# Altium PCB STM32 FillLab WalkThrough.PcbDoc
Units mm, origin at the board's own origin, x right, y up, seen from the top; angles counter-clockwise.
Board outline 34 x 34 mm, 4 copper layers (Top Layer(Signal), L2 (GND), L3 (GND), Bottom Layer(Signal)), stack 1.57 mm thick; 35 components, 27 nets, 172 pads, 102 vias.
Unrouted connection lines stored in the file: 1.
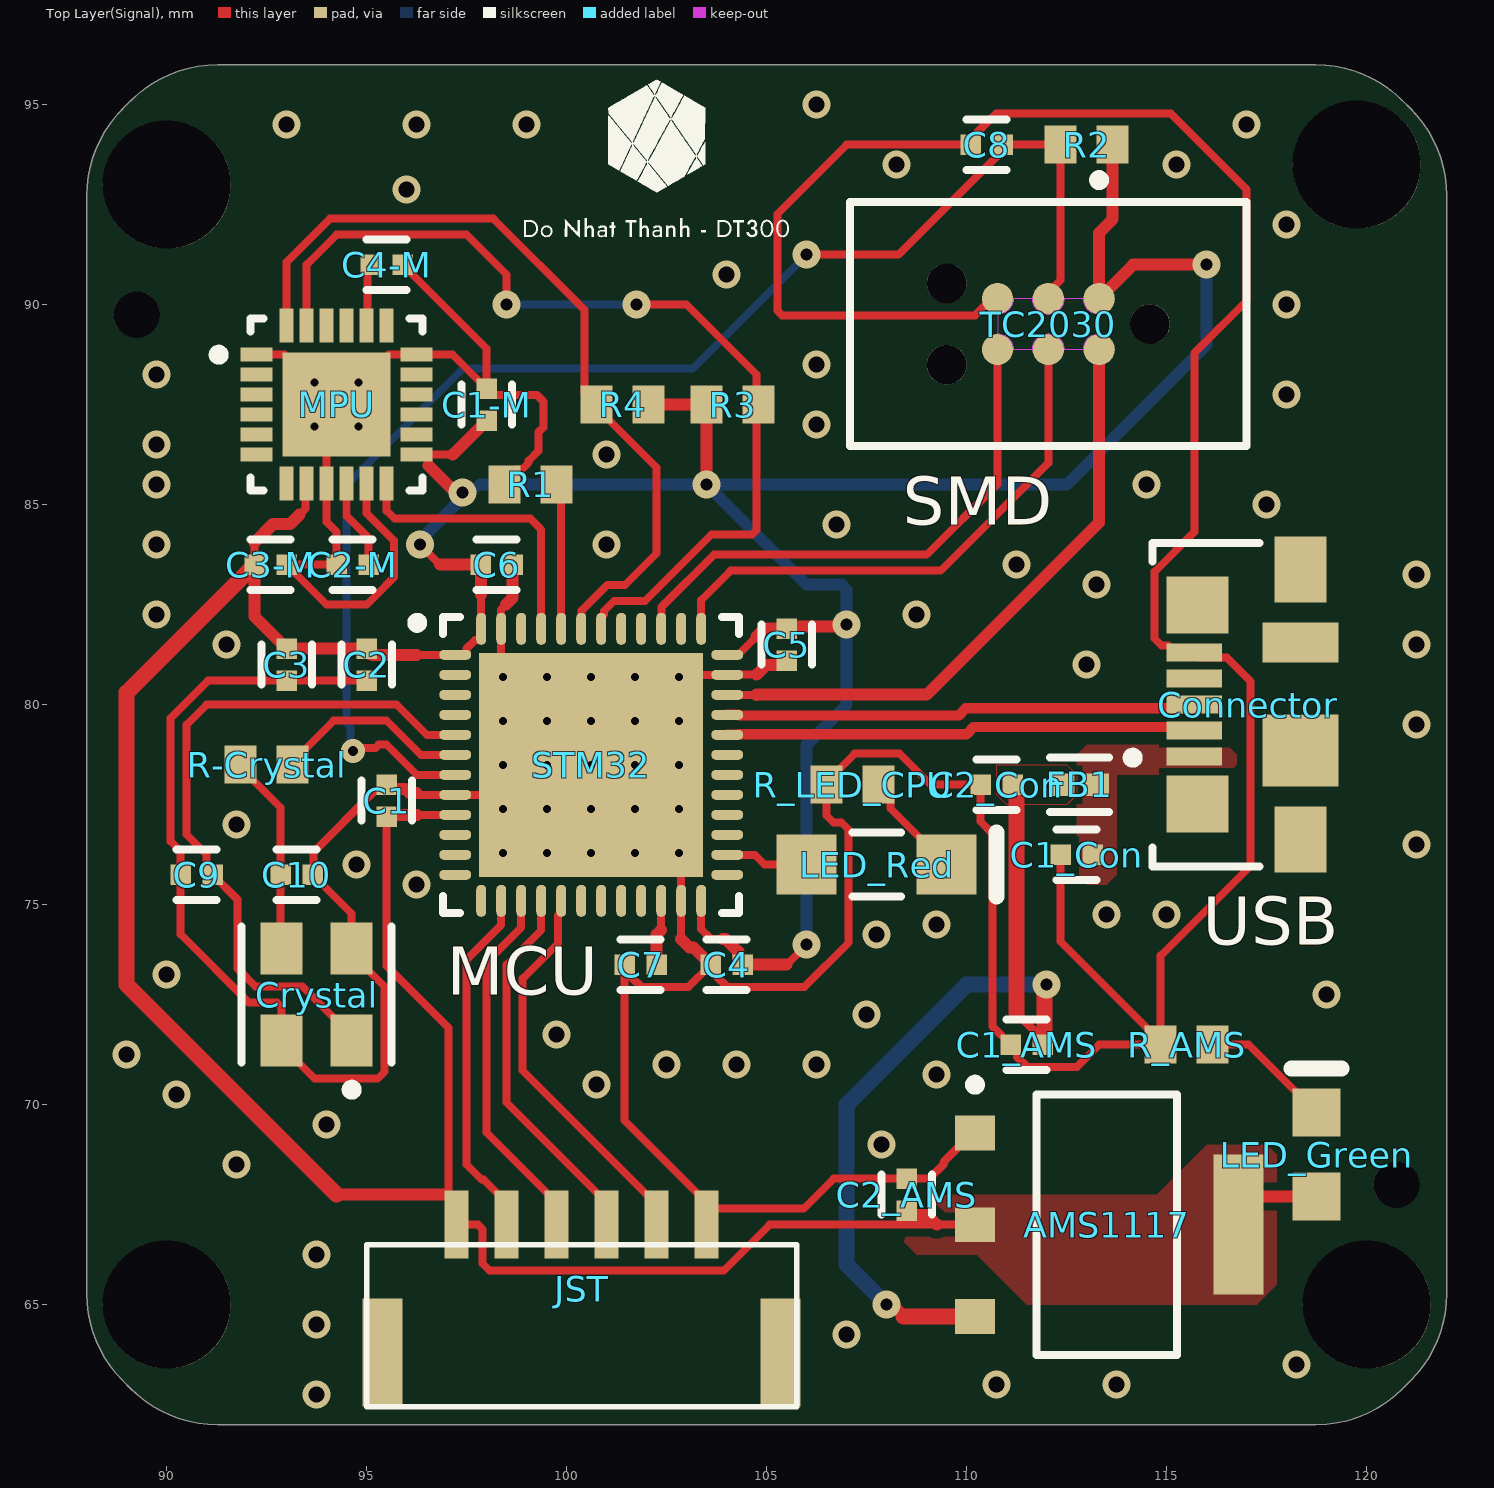
[diagram p0: Top Layer(Signal) view]
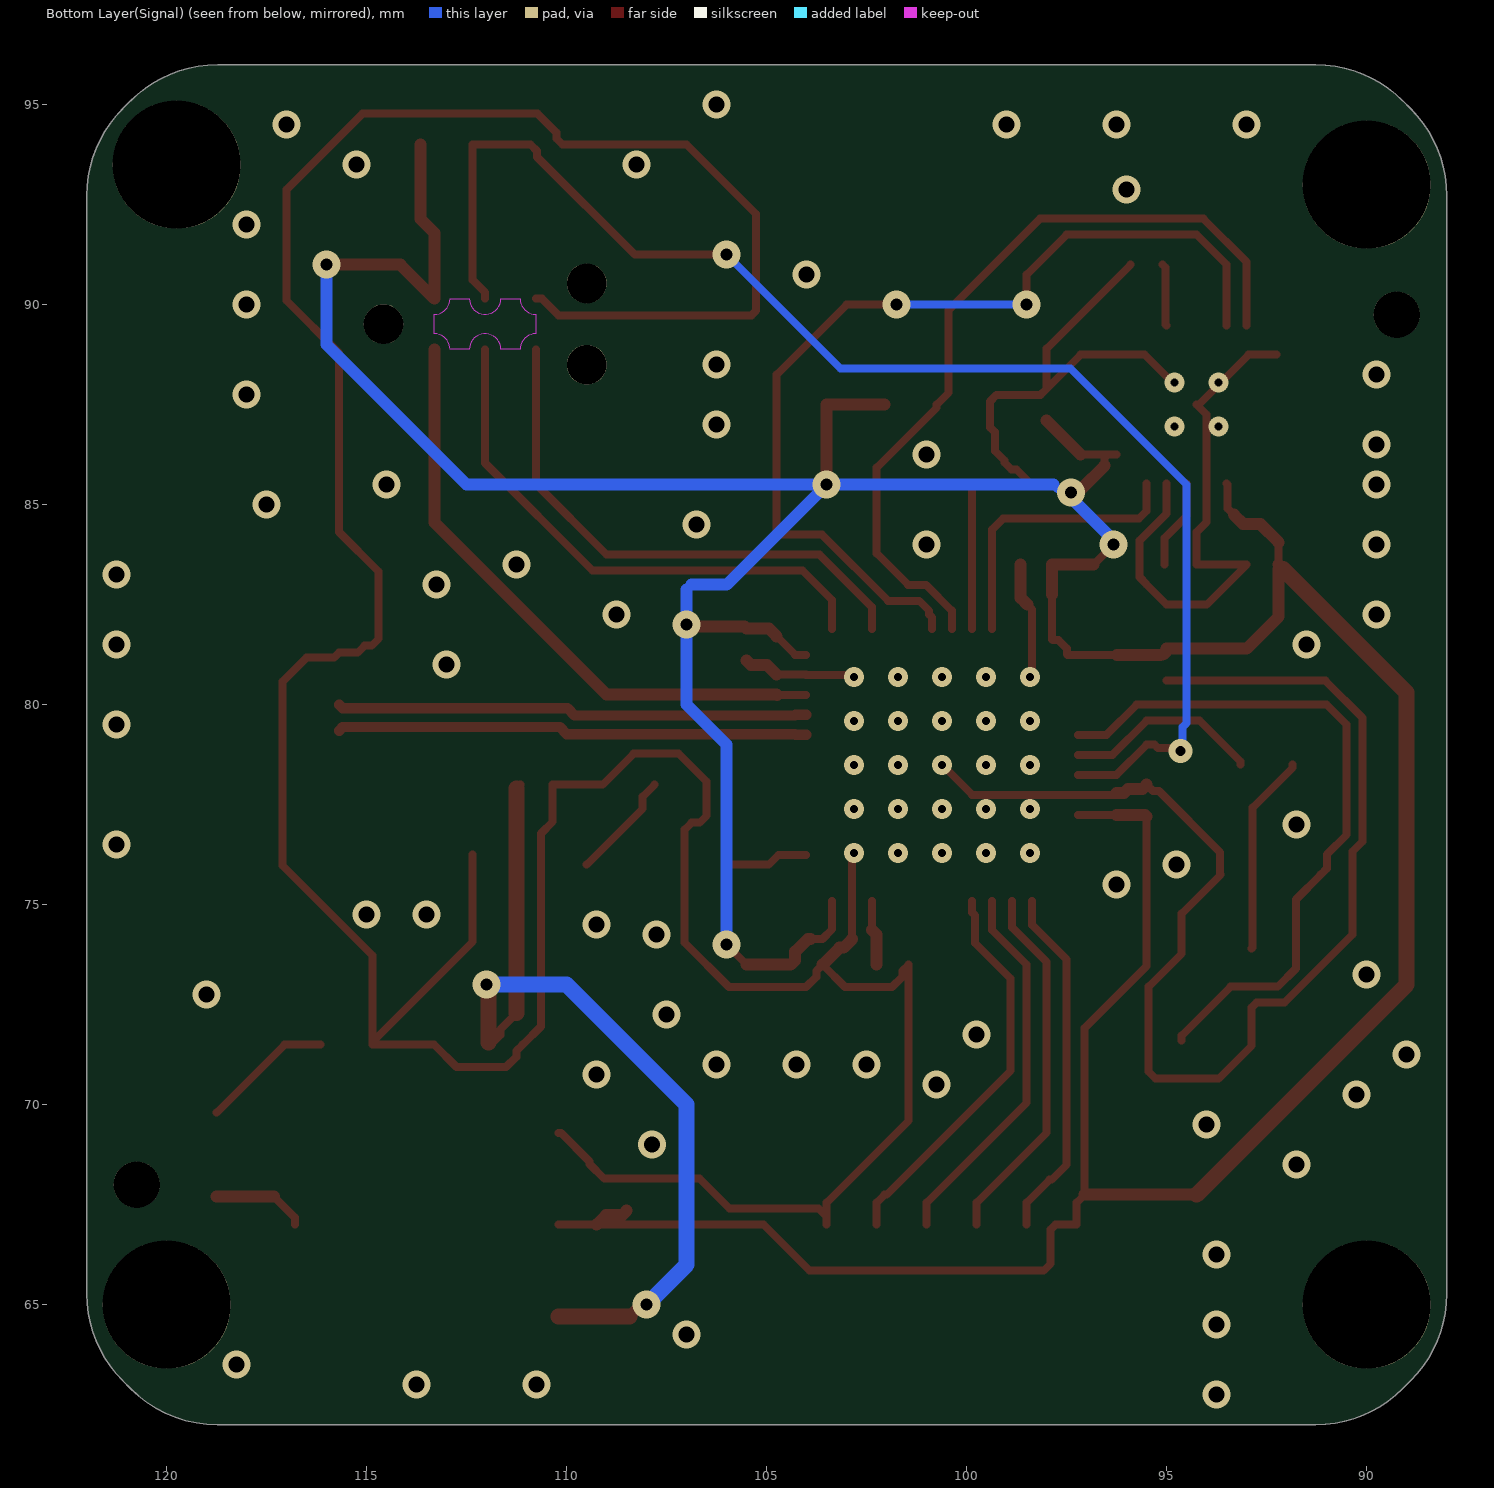
[diagram p1: Bottom Layer(Signal) view, seen from below]
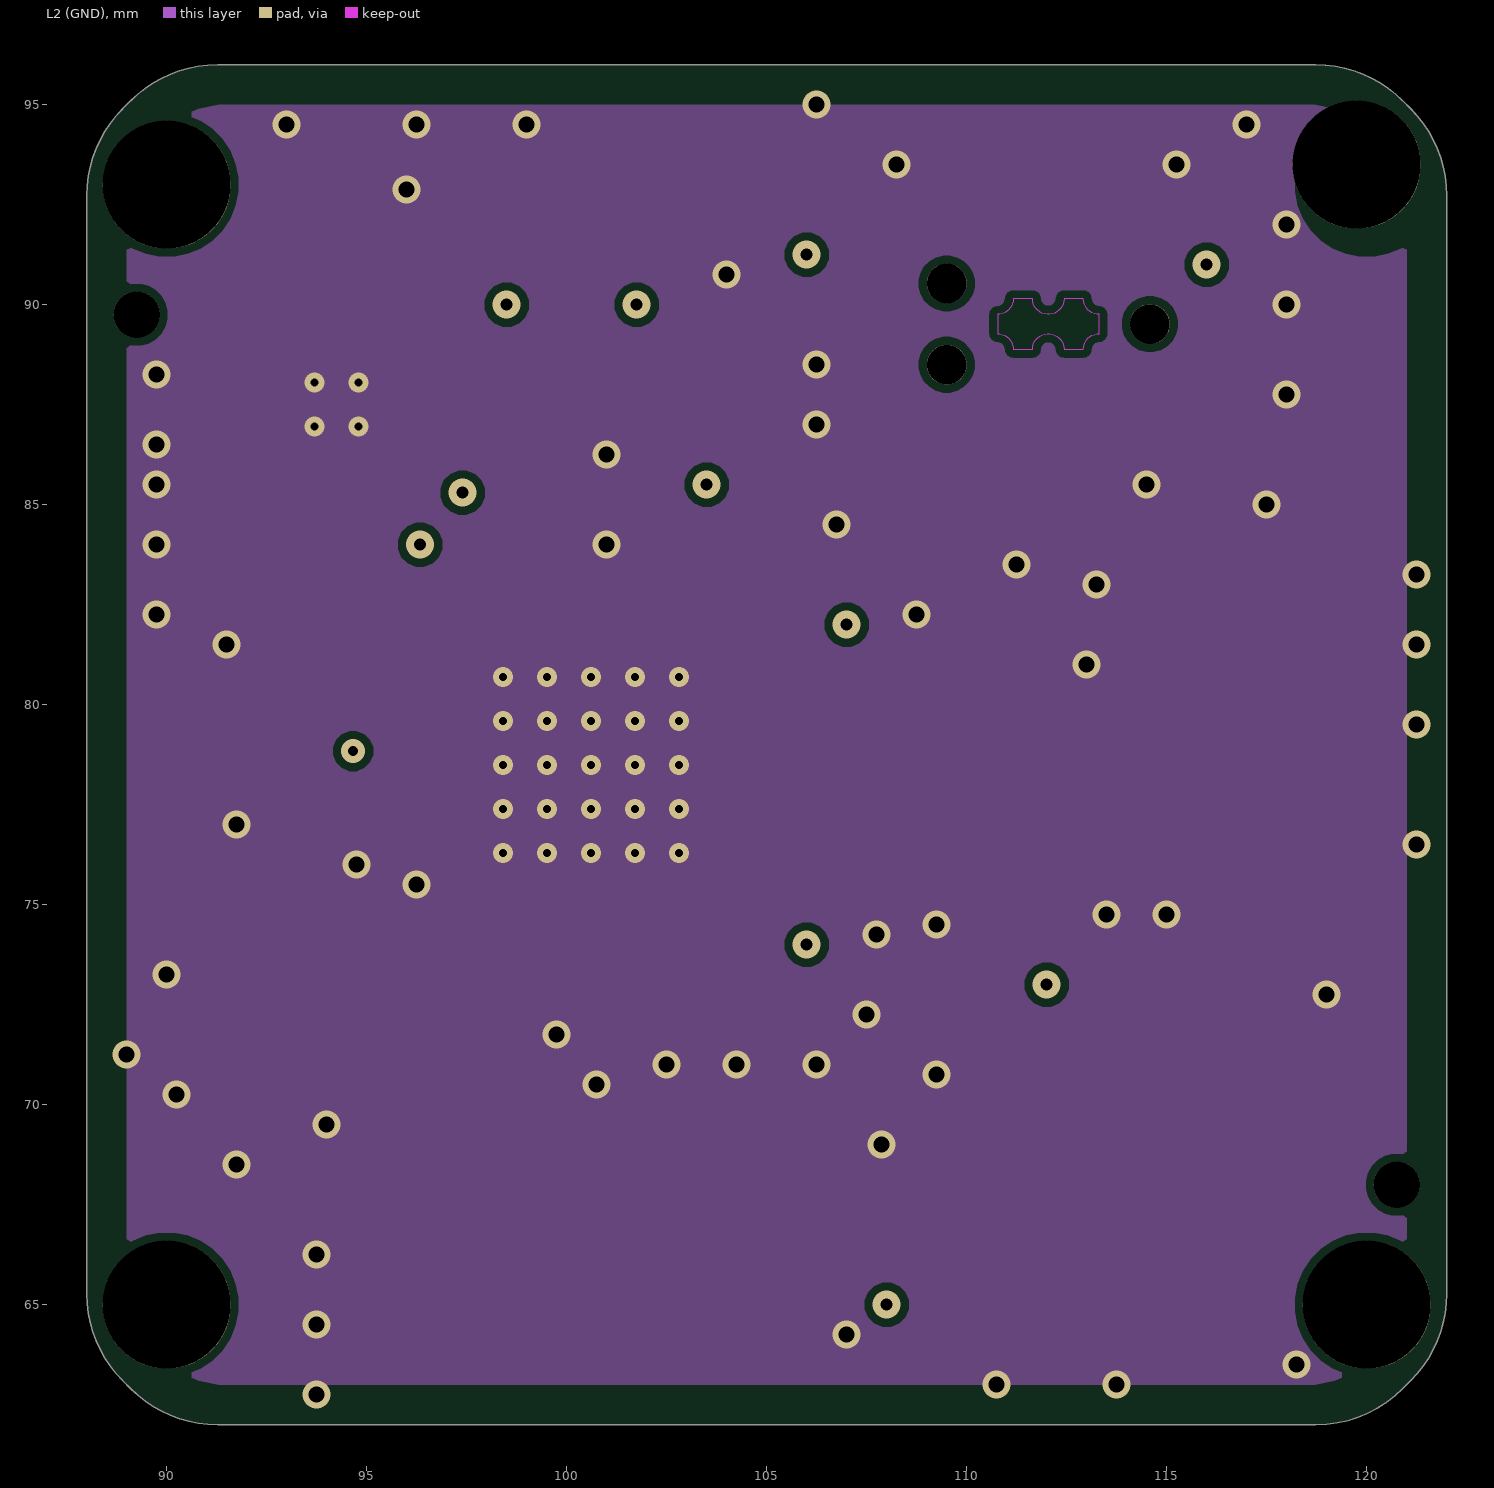
[diagram p2: L2 (GND)]
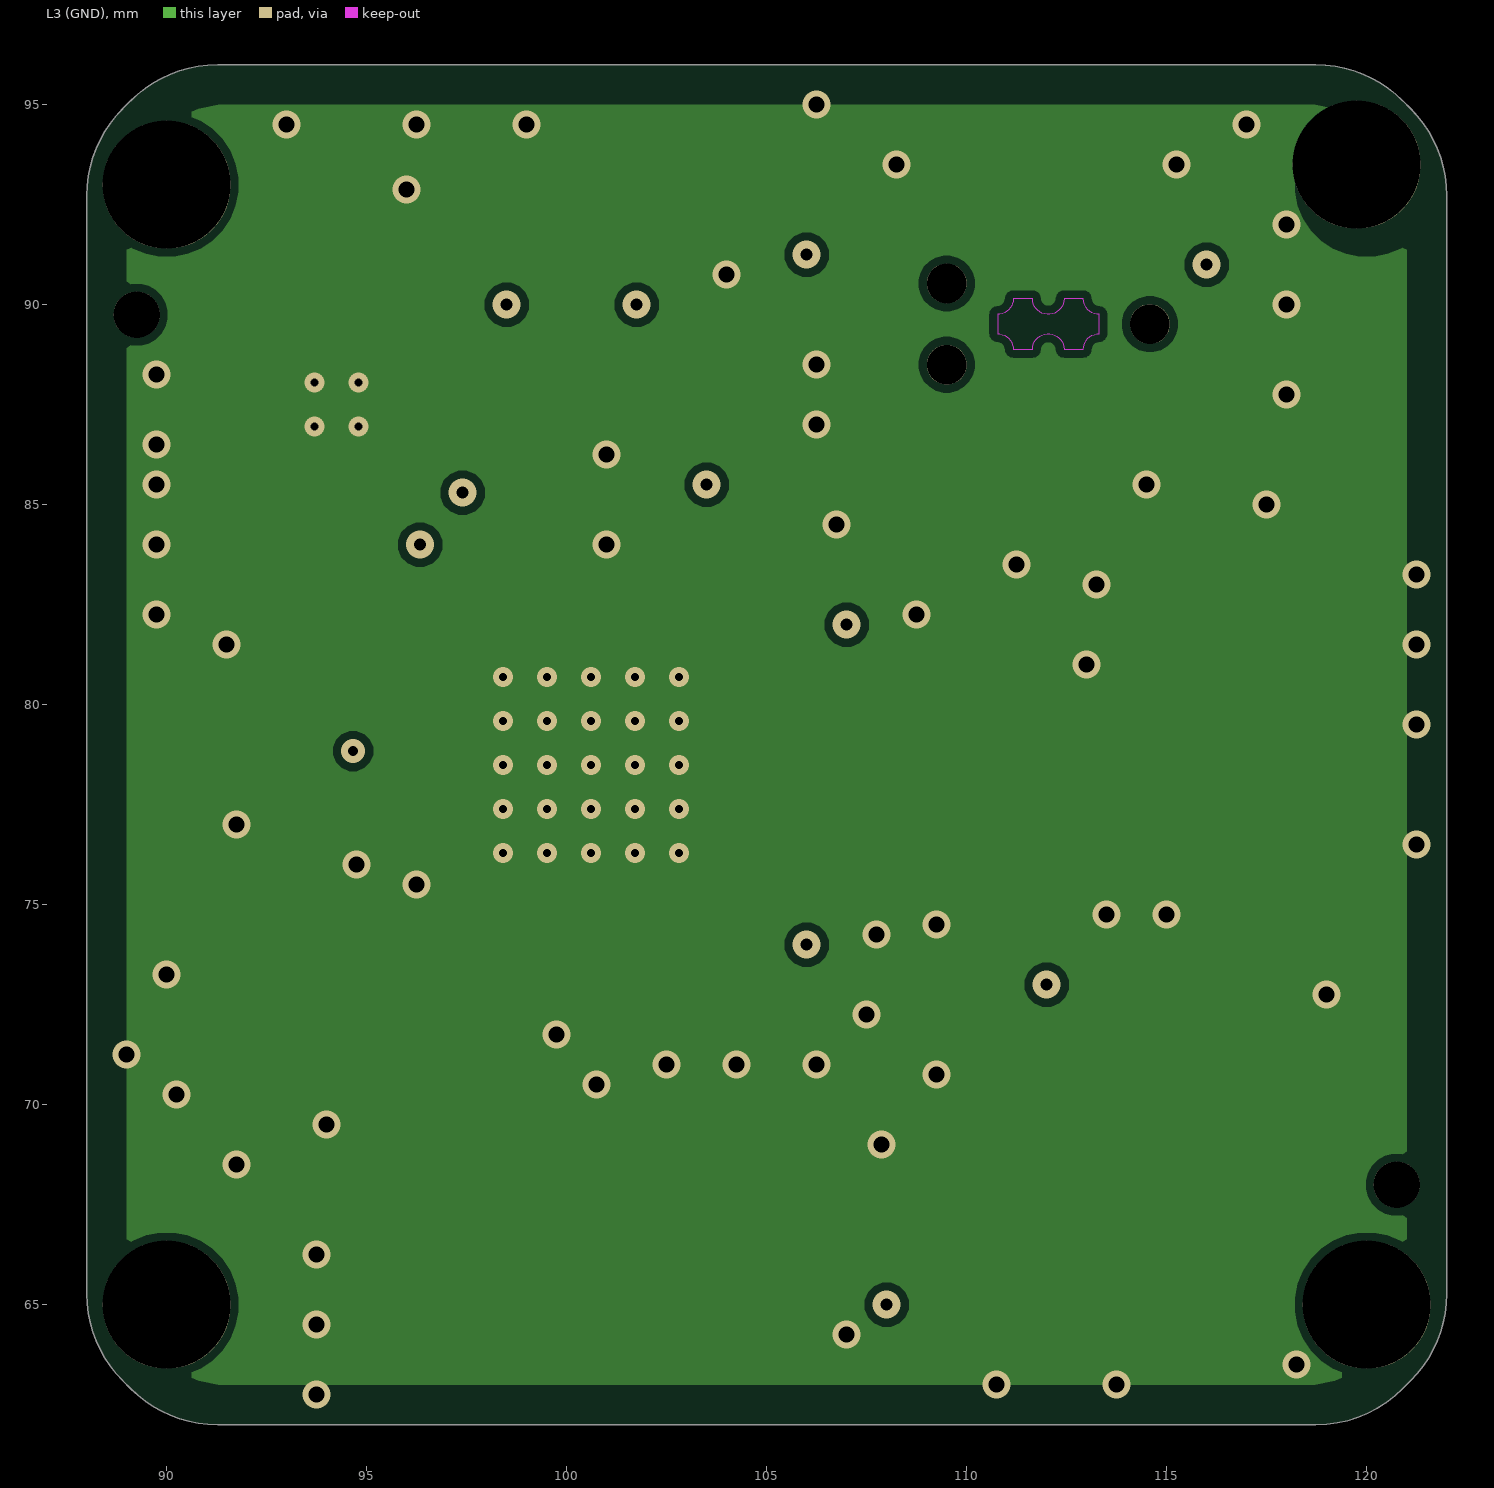
[diagram p3: L3 (GND)]
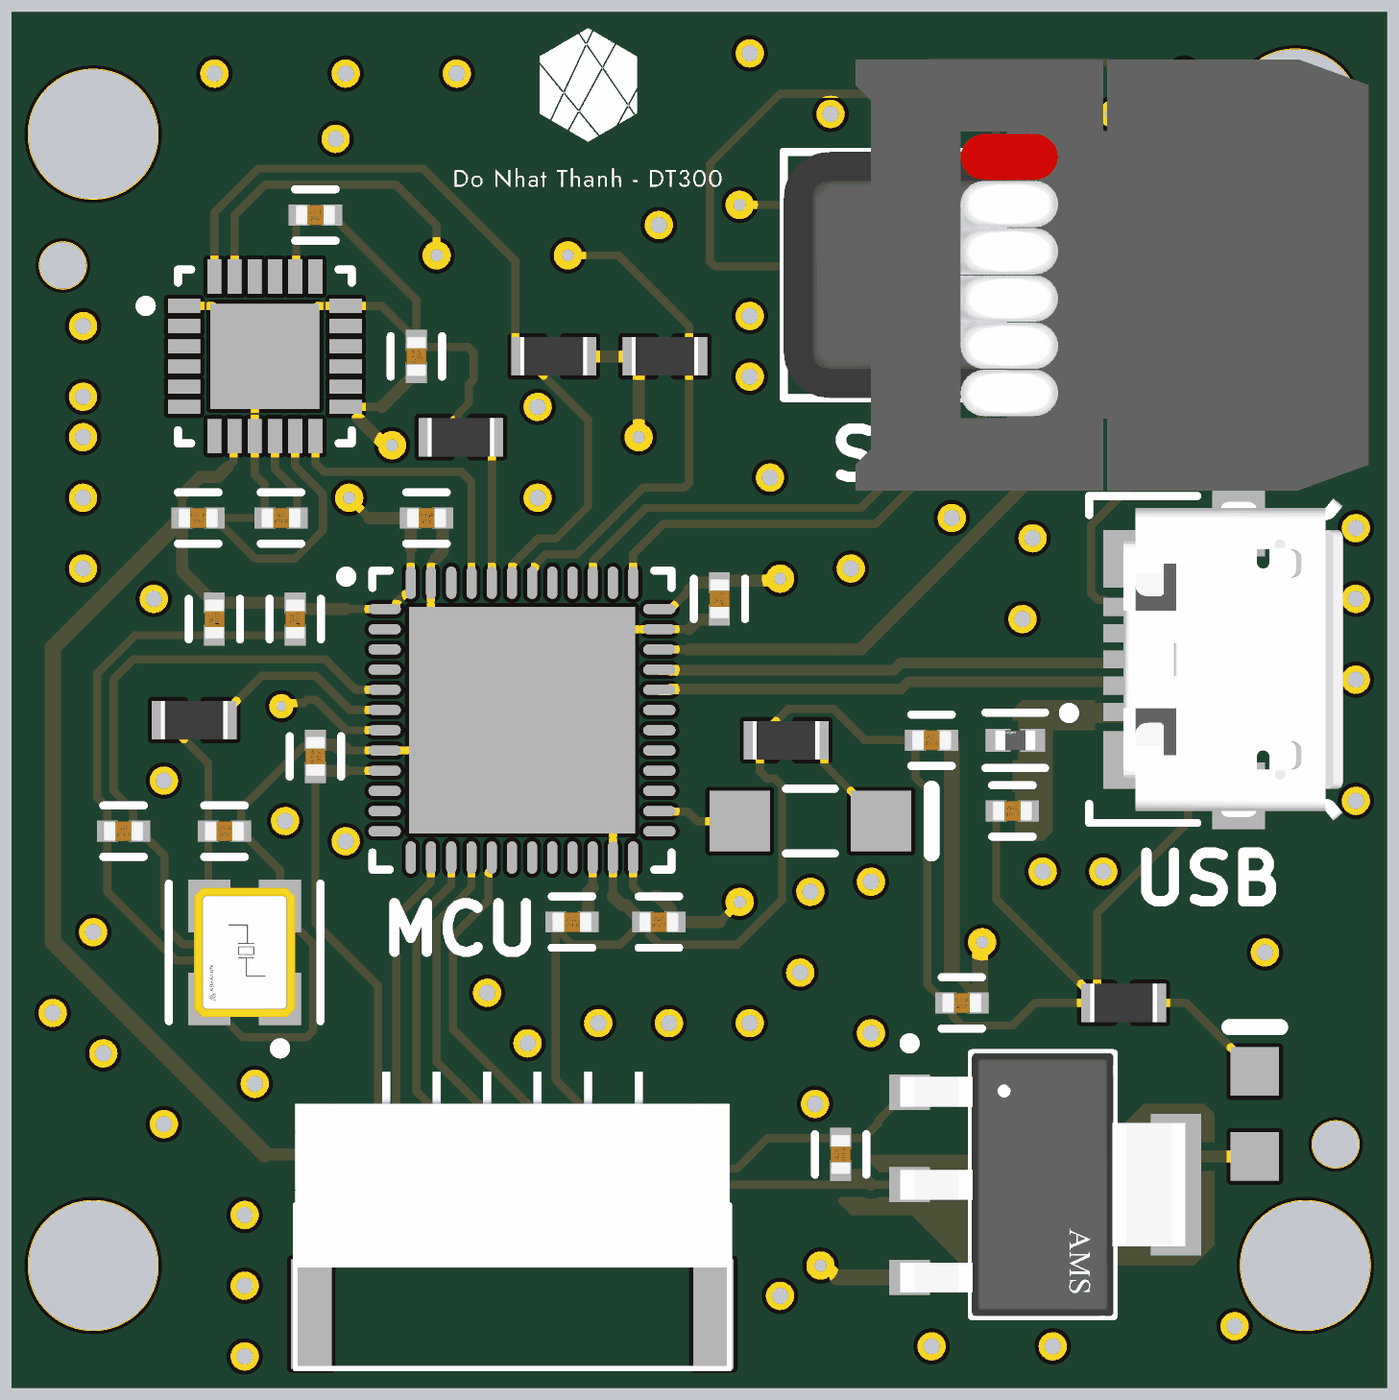
[diagram p4: 3D render of the assembled board from above, using the file's embedded part models]

## Layer stack, top to bottom
Top Solder: solder mask 0.0254, SM-001, Dk 4
Top Layer(Signal): signal copper 0.035
Dielectric 1: prepreg 0.2, PP-017, Dk 4.6
L2 (GND): signal copper 0.0175
Dielectric 3: core 1.065, Core-039, Dk 4.6
L3 (GND): signal copper 0.0175
Dielectric 5: prepreg 0.2, PP-017, Dk 4.6
Bottom Layer(Signal): signal copper 0.035
Bottom Solder: solder mask 0.0254, SM-001, Dk 4

## Board outline
88.898,63.102 89.102,62.898 ccw(c91.27,65.066) 91.27,62 118.73,62 ccw(c118.73,65.066) 120.898,62.898 121.102,63.102 ccw(c118.934,65.27) 122,65.27 122,92.73 ccw(c118.934,92.73) 121.102,94.898 120.898,95.102 ccw(c118.73,92.934) 118.73,96 91.27,96 ccw(c91.27,92.934) 89.102,95.102 88.898,94.898 ccw(c91.066,92.73) 88,92.73 88,65.27 ccw(c91.066,65.27)

## Design rules (kind name [scope] priority, off if disabled: settings)
Clearance [All] p1: gap=0.2 ignorepadtopadclearanceinfootprint=FALSE
DiffPairsRouting [All] p1: maxlimit=0.254 minlimit=0.203 mostfreqgap=0.254 toplayer_maxgap=0.203 toplayer_prefgap=0.203 toplayer_minwidth=0.26 toplayer_maxwidth=0.26 toplayer_prefwidth=0.26 bottomlayer_maxgap=0.203 bottomlayer_prefgap=0.203 bottomlayer_minwidth=0.26 bottomlayer_maxwidth=0.26 bottomlayer_prefwidth=0.26 impedanceprofiledriven=TRUE impedanceprofileid={CB8F44CE-DD59-4646-8E10-60C97DF11226} impedanceprofilevalue=90.000000 maxuncoupledlength=12.7
PolygonConnect [All] p1: connectstyle=Direct reliefconductorwidth=0.254 reliefentries=4 polygonreliefangle="90 Angle" airgapwidth=0.254
RoomDefinition "STM32 FillLab WalkThrough" [InComponentClass('STM32 FillLab WalkThrough')] p1: confinementstyle=ConfineOut formatcopy=TRUE lockcomponents=FALSE outline 56.134,0 329.946,0 329.946,13.97 56.134,13.97
RoutingVias [All] p1: holewidth=0.3 width=0.7 viastyle="Through Hole" minholewidth=0.25 minwidth=0.55 maxholewidth=0.4 maxwidth=0.9
SolderMaskExpansion [All] p1: expansion=0.102 istentingtop=FALSE
UnRoutedNet [All] p1: checkbadconnections=TRUE
Width [All] p1: maxlimit=1 minlimit=0.2 preferedwidth=0.3 midlayer1_minwidth=0.254 midlayer1_maxwidth=0.254 midlayer1_prefwidth=0.254 midlayer2_minwidth=0.254 midlayer2_maxwidth=0.254 midlayer2_prefwidth=0.254 minimp=50.000000 maximp=50.000000 favimp=50.000000
28 further rules are at their usual default settings.

## Classes and differential pairs
differential pair USB: +USB_P -USB_N

## Components (designator, comment, footprint, x,y, rotation, side; value= is the part's Value field where it differs from the comment)
AMS1117 "AMS1117-3.3" FP-AMS1117-IPC_C 113.5,67 r0 top
C1 "2.2uF" FP-C0402-BB-MFG 95.5,77.6 r90 top value="0.10 μF"
C1-M "100nF" FP-C0402-BB-MFG 98,87.5 r90 top value="0.10 μF"
C1_AMS "22uF" FP-C0402-BB-MFG 111.5,71.5 r0 top value="0.10 μF"
C1_Con "2.2uF" FP-C0402-BB-MFG 112.75,76.25 r180 top value="0.10 μF"
C2 "100nF" FP-C0402-BB-MFG 95,81 r270 top value="0.10 μF"
C2-M "100nF" FP-C0402-BB-MFG 94.65,83.5 r180 top value="0.10 μF"
C2_AMS "22uF" FP-C0402-BB-MFG 108.5,67.75 r270 top value="0.10 μF"
C2_Con "2.2uF" FP-C0402-BB-MFG 110.75,78 r180 top value="0.10 μF"
C3 "100nF" FP-C0402-BB-MFG 93,81 r270 top value="0.10 μF"
C3-M "10nF" FP-C0402-BB-MFG 92.6,83.5 r0 top value="0.10 μF"
C4 "100nF" FP-C0402-BB-MFG 104,73.5 r180 top value="0.10 μF"
C4-M "2.2nF" FP-C0402-BB-MFG 95.5,91 r0 top value="0.10 μF"
C5 "100nF" FP-C0402-BB-MFG 105.5,81.5 r270 top value="0.10 μF"
C6 "100nF" FP-C0402-BB-MFG 98.25,83.5 r0 top value="0.10 μF"
C7 "2.2uF" FP-C0402-BB-MFG 101.85,73.5 r180 top value="0.10 μF"
C8 "100nF" FP-C0402-BB-MFG 110.5,94 r180 top value="0.10 μF"
C9 "10pF" FP-C0402-BB-MFG 90.75,75.75 r180 top value="0.10 μF"
C10 "10pF" FP-C0402-BB-MFG 93.25,75.75 r0 top value="0.10 μF"
Connector "473460001" FP-473460001-MFG 118,80 r90 top
Crystal "24MHz" FP-ABM8-MFG 93.75,72.75 r90 top
FB1 "120R" FP-BLM15-0_05-IPC_B 112.821,78 r180 top
JST "SM06B-GHS-TB" JST-GH-6 100.375,67 r0 top
LED_Green "Green" AVAG-HSMX-C170_V 118.75,68.75 r90 top
LED_Red "Red" AVAG-HSMX-C150_V 107.75,76 r0 top
MPU "MPU-6050" IS-QFN-24_V 94.25,87.5 r0 top
R1 "10K" RESC1609X50X30NL8T20 99.1,85.5 r0 top
R2 "10K" RESC1609X50X30NL8T20 113,94 r0 top
R3 "2K2" RESC1609X50X30NL8T20 104.15,87.5 r180 top
R4 "2K2" RESC1609X50X30NL8T20 101.4,87.5 r0 top
R-Crystal "0R" RESC1609X50X30NL8T20 92.5,78.5 r180 top
R_AMS "1K" RESC1609X50X30NL8T20 115.5,71.5 r0 top
R_LED_CPU "1K" RESC1609X50X30NL8T20 107.15,78 r0 top
STM32 "STM32F411CEU6" STM-UFQFPN48_L 100.613,78.498 r0 top
TC2030 "TC2030-CTX-NL" FP-TC2030-CTX-NL-MFG 112.04,89.516 r180 top

## Footprints (in the part's own frame and the unit in brackets; to place one, negate y for a bottom-side part, rotate by r counter-clockwise, add the part's x,y. Pads: shape width x height; smd on the part's side, far side on the other; paste and mask are expansions set on the pad)
AVAG-HSMX-C150_V [mm] "SMD, 2-Leads, Body 3.2x1.6mm"
  rect 1.5x1.5 smd: 1(-1.75,0) 2(1.75,0)
  silkscreen extent -0.6,-0.8 3,0.8, body extent -1.6,-0.8 1.6,0.8, height 1.1
AVAG-HSMX-C170_V [mm] "SMD, 2-Leads, Body 2x1.25mm, Height 0.8mm"
  rect 1.2x1.2 smd: 1(-1.05,0) 2(1.05,0)
  silkscreen extent 2.15,-0.63 2.15,0.63, body extent -1,-0.63 1,0.63, height 0.8
FP-473460001-MFG [mm]
  rect 0.45x1.38 smd paste+0 mask+0: 1(-1.3,2.31) 2(-0.65,2.31) 3(0,2.31) 4(0.65,2.31) 5(1.3,2.31)
  rect 1.425x1.55 smd paste+0 mask+0: 6(-2.488,2.225) 7(2.488,2.225)
  rect 1.65x1.3 smd paste+0 mask+0: 8(-3.375,-0.35) 11(3.375,-0.35)
  rect 1.8x1.9 smd paste+0 mask+0: 9(-1.15,-0.35)
  rect 1x1.9 smd paste+0 mask+0: 10(1.55,-0.35)
  silkscreen extent -4.05,0.67 4.05,3.97, body extent -4.3,-2.48 4.3,3.45, height 0.25
FP-ABM8-MFG [mm]
  rect 1.3x1.05 smd paste+0 mask+0: 1(-1.15,-0.875) 2(1.15,-0.875) 3(1.15,0.875) 4(-1.15,0.875)
  silkscreen extent -2.5,-1.88 1.7,1.88, body extent -1.9,-1.5 1.9,1.5, height 0.25
FP-AMS1117-IPC_C [mm]
  rect 1.004x0.872 smd paste+0 mask+0: 1(-3.295,2.29) 2(-3.295,0) 3(-3.295,-2.29)
  rect 1.25x3.5 smd paste+0 mask+0: 4(3.295,0)
  silkscreen extent -3.42,-3.25 1.75,3.62, body extent -3.9,-3.35 3.9,3.35, height 0.25
FP-BLM15-0_05-IPC_B [mm]
  rect 0.615x0.572 smd paste+0 mask+0: 1(-0.429,0) 2(0.429,0)
  silkscreen extent -0.74,-0.69 0.74,0.69, body extent -0.89,-0.44 0.89,0.44, height 0.25
FP-C0402-BB-MFG [mm]
  rect 0.52x0.52 smd paste+0 mask+0: 1(-0.4,0) 2(0.4,0)
  silkscreen extent -0.5,-0.64 0.5,0.64, body extent -0.8,-0.4 0.8,0.4, height 0.25
FP-TC2030-CTX-NL-MFG [mil]
  round 30.98 smd paste-39370.1 mask+0: 1(-50,-25) 2(-50,25) 3(0,-25) 4(0,25) 5(50,-25) 6(50,25)
  round 39.02 hole 39.02 unplated paste-39370.1 mask+0: ""(-100,0) ""(100,-40) ""(100,40)
  Keep-Out Layer region: -34.51,-25 -15.49,-25 -13.96,-18.28 -9.66,-12.89 -3.45,-9.9 3.45,-9.9 9.66,-12.89 13.96,-18.28 15.49,-25 15.49,-25 34.51,-25 35.69,-19.07 39.05,-14.05 44.07,-10.69 50,-9.51 50,-9.51 50,9.51 44.07,10.69 39.05,14.05 35.69,19.07 34.51,25 34.51,25 15.49,25 13.96,18.28 9.66,12.89 3.45,9.9 -3.45,9.9 -9.66,12.89 -13.96,18.28 -15.49,25 -15.49,25 -34.51,25 -35.69,19.07 -39.05,14.05 -44.07,10.69 -50,9.51 -50,9.51 -50,-9.51 -44.07,-10.69 -39.05,-14.05 -35.69,-19.07 -34.51,-25
  silkscreen extent -195,-147 195,120, body extent -199,-124 199,124, height 10
IS-QFN-24_V [mm] "QFN, 24-Leads, Body 4x4mm, Pitch 0.5mm, Thermal Pad 2.7x2.6mm"
  rect 0.8x0.35 smd: 1(-2,1.25) 2(-2,0.75) 3(-2,0.25) 4(-2,-0.25) 5(-2,-0.75) 6(-2,-1.25) 13(2,-1.25) 14(2,-0.75) 15(2,-0.25) 16(2,0.25) 17(2,0.75) 18(2,1.25)
  rect 0.35x0.85 smd mask+0.102: 7(-1.25,-1.975) 8(-0.75,-1.975) 9(-0.25,-1.975) 10(0.25,-1.975) 11(0.75,-1.975) 12(1.25,-1.975) 19(1.25,1.975) 20(0.75,1.975) 21(0.25,1.975) 22(-0.25,1.975) 23(-0.75,1.975) 24(-1.25,1.975)
  rect 2.7x2.6 smd: 25(0,0)
  silkscreen extent -3.07,-2.15 2.15,2.15, body extent -2,-2 2,2, height 0.95
JST-GH-6 [mm]
  rect 0.6x1.7 smd: P$1(-3.125,0) P$2(-1.875,0) P$3(-0.625,0) P$4(0.625,0) P$5(1.875,0) P$6(3.125,0)
  rect 1x2.7 smd: P$7(-4.975,-3.2) P$8(4.975,-3.2)
  silkscreen extent -5.38,-4.55 5.38,-0.5, body extent -5.38,-2.05 5.38,2.8, height 4.25
RESC1609X50X30NL8T20 [mm] "Chip Resistor, 2-Leads, Body 1.65x0.95mm, IPC Medium Density"
  rect 0.8x0.95 smd: 1(-0.65,0) 2(0.65,0)
  body extent -0.82,-0.48 0.82,0.48, height 0.5
STM-UFQFPN48_L [mm] "QFN, 48-Leads, Body 7.1x7.1mm, Pitch 0.5mm, Thermal Pad 5.6x5.6mm, IPC High Density"
  oval 0.8x0.25 smd: 1(-3.4,2.75) 2(-3.4,2.25) 3(-3.4,1.75) 4(-3.4,1.25) 5(-3.4,0.75) 6(-3.4,0.25) 7(-3.4,-0.25) 8(-3.4,-0.75) 9(-3.4,-1.25) 10(-3.4,-1.75) 11(-3.4,-2.25) 12(-3.4,-2.75) 25(3.4,-2.75) 26(3.4,-2.25) 27(3.4,-1.75) 28(3.4,-1.25) 29(3.4,-0.75) 30(3.4,-0.25) 31(3.4,0.25) 32(3.4,0.75) 33(3.4,1.25) 34(3.4,1.75) 35(3.4,2.25) 36(3.4,2.75)
  oval 0.25x0.8 smd: 13(-2.75,-3.4) 14(-2.25,-3.4) 15(-1.75,-3.4) 16(-1.25,-3.4) 17(-0.75,-3.4) 18(-0.25,-3.4) 19(0.25,-3.4) 20(0.75,-3.4) 21(1.25,-3.4) 22(1.75,-3.4) 23(2.25,-3.4) 24(2.75,-3.4) 37(2.75,3.4) 38(2.25,3.4) 39(1.75,3.4) 40(1.25,3.4) 41(0.75,3.4) 42(0.25,3.4) 43(-0.25,3.4) 44(-0.75,3.4) 45(-1.25,3.4) 46(-1.75,3.4) 47(-2.25,3.4) 48(-2.75,3.4)
  rect 5.6x5.6 smd: 49(0,0)
  silkscreen extent -4.47,-3.7 3.7,3.7, body extent -3.55,-3.55 3.55,3.55, height 0.6

## Part data
AMS1117: library part CMP-209535-000001-1, "LDO Voltage Regulators 1A, 3.3V", Dropout Voltage=1.1V, Manufacturer="Advanced Monolithic Systems", Max Junction Temp=+125°C, Max Power Dissipation=1.2W, Max Supply Voltage=15V, Nominal Supply Current=5mA, Output Current=1A, Output Voltage=3.3V, Package=AMS1117, Temperature="-40°C to +125°C", Temperature Range Low=-40°C, Automotive=No, Category=IC, ComponentLink2Description=Datasheet, ComponentLink2URL=http://www.advanced-monolithic.com/pdf/ds1117.pdf, Device Class L1="Integrated Circuits (ICs)", Device Class L2="Power Management ICs", Device Class L3="Voltage Regulators - Linear", Height=1.8mm, Ipc Land Pattern Name=SOT229P700X180-4, Lead Free=Yes, Manufacturer Part Number=AMS1117-3.3, Number of Outputs=1, Octopart=https://octopart.com/ams1117-3.3-advanced+monolithic+systems-25899300, Output Type=Fixed, RoHS=TRUE, Standoff Height=0.64mm, Temperature Range High=+125°C
C1 C1-M C1_AMS C1_Con C2 C2-M C2_AMS C2_Con C3 C3-M C4 C4-M C5 C6 C7 C8 C9 C10: library part CMP-2008-02046-2, "CAP CER 0.1UF 10V X5R 0402", Capacitance="0.10 μF", Manufacturer=Kemet, Manufacturer Part Number=C0402C104K8PACTU, Package=C0402-BB, Temperature="-55°C to +125°C", Temperature Characteristic=X5R, Temperature Coefficient=15%, Temperature Range High=+125°C, Temperature Range Low=-55°C, Tolerance=0.1, Voltage Rating="10 V", Automotive=No, Category=Cap, ComponentLink2Description=Datasheet, ComponentLink2URL=https://content.kemet.com/datasheets/KEM_C1002_X7R_SMD.pdf, Device Class L1="Passive Components", Device Class L2=Capacitors, Device Class L3="Ceramic Capacitors", Digikey Description="CAP CER 0.1UF 10V X5R 0402", Height=0.55mm, Ipc Land Pattern Name=CAPC10050X50, Lead Free=Yes, Material=Ceramic, Mouser Description="Capacitor 100 nF 10 VDC 0402", Octopart=https://octopart.com/c0402c104k8pactu-kemet-140039, RoHS=TRUE
Connector: library part CMP-2000-05246-2, "CONN RCPT USB2.0 MICRO B SMD R/A", Current Rating=1.8A, Manufacturer=Molex, Package=0, Temperature="-30°C to +85°C", Temperature Range High=+85°C, Temperature Range Low=-30°C, Voltage Rating=30V, Automotive=No, Category=Conn, ComponentLink2Description=Datasheet, ComponentLink2URL=https://www.molex.com/webdocs/datasheets/pdf/en-us/0473460001_IO_CONNECTORS.pdf, Conn Orientation="Right Angle", Contact Material=Gold,Nickel, Device Class L1=Connectors, Device Class L2="USB Connectors", Device Class L3=unset, Digikey Description="CONN RCPT USB2.0 MICRO B SMD R/A", Footprint Url=https://www.molex.com/pdm_docs/sd/473460001_sd.pdf, Height=2.945mm, Is Female=yes, Lead Free=Yes, Manufacturer Part Number=473460001, Number of Contacts=5, Octopart=https://octopart.com/47346-0001-molex-7164928, Pitch=0.65mm, RoHS=TRUE, Shielding=true, Usb Standard="USB 2.0"
Crystal: library part CMP-27762-000036-1, "Crystal 24MHz ±20ppm 18pF SMD-4 3.2mm x 2.5mm", Case/Package=CSMD, ESR (Equivalent Series Resistance)=50R, Frequency Stability=50ppm, Frequency Tolerance=20ppm, Load Capacitance=18pF, Max Operating Temperature=70°C, Min Operating Temperature=-20°C, Operating Frequency="24 MHz", Package Quantity=1000, Resistor Type=Ceramic, Accuracy=20ppm, Depth=2.5mm, Frequency=24MHz, Height=0.031inch, Lead Free="Lead Free", Length=3.2mm, Mount="Surface Mount", Number of Pins=4, Packaging="Tape and Reel", Radiation Hardening=No, REACH SVHC="No SVHC", RoHS Compliant=Yes, Series=ABM8, Series Resistance=50R, Termination=SMD/SMT, Tolerance=20ppm, Width=2.5mm
FB1: library part CMP-0686-00181-5, "Chip Ferrite Bead, 0402, 1000Ω @ 100MHz, 0.65Ω, 25%, 300mA", Case Code (Imperial)=0402, Case Code (Metric)=1005, Current Rating=300mA, DC Current=200mA, DC Resistance (DCR)=650mR, DC Resistance-Max=1R, Frequency=100MHz, Max Operating Temperature=125°C, Min Operating Temperature=-55°C, Package Quantity=1, Tolerance=25%, Case/Package=0402, Core Material=Ferrite, Depth=0.55mm, Height=0.5mm, Impedance=1kR, Lead Free="Lead Free", Length=1mm, Material=Ferrite, Max Current Rating=300mA, Max DC Current=200mA, Military Standard=Not, Number of Circuits=1, Number of Lines=1, Number of Pins=2, Packaging="Tape and Reel", Radiation Hardening=No, REACH SVHC="No SVHC", RoHS Compliant=Yes, Series=BLM15AG_SN, Shielding=Unshielded, Termination=SMD/SMT, Test Frequency=100MHz, Width=0.5mm
JST: "Connector Header Surface Mount, Right Angle 6 position 0.049 (1.25mm)", Package=None, Check_prices=https://www.snapeda.com/parts/SM06B-GHS-TB/JST+Sales+America+Inc./view-part/?ref=eda, MF="JST Sales", MP=SM06B-GHS-TB, SnapEDA_Link=https://www.snapeda.com/parts/SM06B-GHS-TB/JST+Sales+America+Inc./view-part/?ref=snap
LED_Green: library part CMP-2000-05062-1, "Chip LED, Green, 2.2 V, -40 to 85 degC, 2-Pin SMD, Pb-Free, Tape and Reel", Forward Current If=20mA, Forward Voltage=2.2V, Forward Voltage VF Max=2.6V, Manufacturer=Avago, Operating Temperature Max=85degC, Operating Temperature Min=-30degC, Operating Temperature Range=-30degCto+85degC, Opto Case Style=SMD, Package Description="2-Pin Surface Mount Device, Body 2 x 1.25 mm, Height 0.8 mm", Package Reference=HSMX-C170, Storage Temperature Min=-40degC, Bulb Size=1.25mmx1.4mm, Datasheet URL=https://datasheet.ciiva.com/29280/180495-da-01-en-chip-led-hsmg-c170-gelb-gruen-29280971.pdf, Datasheet Version=Oct-08, Dominant Wavelength=572nm, Dominant Wavelength Typ=572nm, External Depth=0.8mm, External Length / Height=2mm, External Width=1.25mm, Forward Current If Max=20mA, LED Colour=Green, LED Mounting=SMD, LED Type=Standard, Lens Shape=Rectangular, Light Area Height=1mm, Luminous Intensity=15mcd, Luminous Intensity Min=4mcd, Luminous Intensity Typ=15mcd, Manufacturer URL=http://www.avagotech.com/, Mounting Type=SMD, MSL=MSL2A-4weeks, No. of Pins=2, Opto Mounting Orientation=Top, Packaging=CutTape, Peak Forward Current=20mA, Peak Wavelength=570nm, PIV Max=5V, Storage Temperature Max=85degC, SVHC=NoSVHC(16-Jun-2014), Viewing Angle=170deg, Voltage Vf Typ=2.2V, Wavelength Typ=570nm
LED_Red: library part CMP-2000-06426-1, "LED Uni-Color Red, 65 mW, 25 mA, -40 to 85 degC, 2-Pin SMD, RoHS, Tape and Reel", Forward Current=25mA, Forward Voltage=2.6V, Manufacturer=Avago, Operating Temp Range=-40Cto85C, Operating Temperature Classification=Industrial, Package Description="2-Pin Surface Mount Device, Body 3.2 x 1.6 mm", Package Reference=HSMX-C150, Package Type=ChipLed, Power Dissipation=78W, Reverse Voltage=5V, Test Current (It)=20mA, Chip Material=GaAlAs, Datasheet URL=http://media.digikey.com/pdf/Data%20Sheets/Avago%20PDFs/HSMz-Czzz.pdf, Datasheet Version=03/2012, DELETED=Compliant, Dominant Wave Length=639nm, Emitting Color=Red, High Brightness=No, Lens Dimensions=2x1.6x0.6mm, Lens Type=ColorlessDiffused, Lum Intensity=17mcd, Luminous Intensity=17mcd, Main Category=ChipLED, Manufacturer URL=http://www.avagotech.com/, Mounting=SurfaceMount, Mounting Technology=SurfaceMount, Number of  Elements=1, Packaging=TapeandReel, Peak Wavelength=660nm, Pin Count=2, Product Depth (mm)=1.6mm, Product Height (mm)=1.1mm, Product Length (mm)=3.2mm, Rad Hardened=No, Shape Type=Rectangular, Type=Uni-Color, Viewing Angle=170deg
MPU: library part CMP-1753-00002-2, "3-Axis Gyroscope, Accelerometer and a Digital Motion Processor(TM) (DMP), 2.375 to 3.46 V, -40 to 85 degC, 24-Pin QFN, RoHS, Tape and Reel", Manufacturer=InvenSense, Standard Package=5,000, Category=Sensors,Transducers, Datasheet URL=http://datasheet.octopart.com/MPU-6050-InvenSense-datasheet-14421344.pdf, Datasheet Version="Rev. 3.3, 05/2012", Dynamic Catalog=MPU-6000™Series, Family=Multifunction, Featured Product=MPU-60506-Axis,IntegratedI²CSolution, Manufacturer URL=http://www.invensense.com/, Online Catalog=MPU-6000™Series, Other Names="1428-1007-2 / MPU6050", Output Type=Digital, Sensor Type=MotionTracking, Unit PriceUSD=Digital
R1 R2 R3 R4 R-Crystal R_AMS R_LED_CPU: library part CMP-1666-00005-4, "Chip Resistor, 10 KOhm, +/- 1%, 100 mW, -55 to 155 degC, 0603 (1608 Metric), RoHS, Tape and Reel", Manufacturer="Vishay Semiconductor", Max Operating Temperature="155 degC", Min Operating Temperature="-55 degC", Package Quantity=5000, Voltage Rating="75 V", ComponentLink1Description="Manufacturer URL", ComponentLink1URL=http://www.vishay.com/, ComponentLink2Description=Datasheet, ComponentLink2URL=https://datasheet.ciiva.com/11809/0900766b80d98afc-11809037.pdf, DatasheetVersion=06/2012, Height="0.45 mm", Length="1.55 mm", Mounting Technology="Surface Mount", PackageDescription="2-Pin Surface Mount Device, Body 1.575 x 0.85 mm", PackageReference=0603, Packaging="Tape and Reel", REACH SVHC=Unknown, RoHSCompliant=true
STM32: library part CMP-0243-00165-1, "ARM Cortex-M4 32-bit MCU+FPU, 512 KB Flash, 128 KB RAM, 36 I/Os, 48-Pin UFQFPN, -40 to 85 degC, Tray", I/Os (High Current)=36, Operating Frequency(F) (Processor speed) (MHz)=100, Package Description=UFQFPN48, Package Reference="48-Pin Ultra Thin Fine Pitch Quad Flat No-Lead, 7 x 7 x 0.6 mm Body, 0.5 mm Pitch, Exposed Pad", Supply Voltage(Vcc) min (V)=1.7, ComponentLink1Description="Manufacturer URL", ComponentLink1URL=http://www.st.com/, ComponentLink2Description=Datasheet, ComponentLink2URL=http://www.st.com/st-web-ui/static/active/en/resource/technical/document/datasheet/DM00115249.pdf, Core="ARM Cortex-M4", DatasheetVersion="Rev. 6", FLASH Size (Prog) (kB)=512, Internal RAM Size (kB)=128, Mounting Technology="Surface Mount", Packing=Tray
TC2030: library part CMP-205963-000001-1, "6-Pin “No legs” TC2030 Plug-of-Nails™ Cable for use with ARM Cortex processors"

## Free pads (board coordinates)
  round 3.2 hole 3.2: MH(90,65) MH(90,93) MH(119.75,93.5) MH(120,65)
  round 1.152 hole 1.152: TH(89.25,89.75) TH(120.75,68)

## Via types
v1: diameter 0.7, hole 0.4, Top Layer(Signal) to Bottom Layer(Signal), 61 vias
v2: diameter 0.5, hole 0.2, Top Layer(Signal) to Bottom Layer(Signal), 29 vias
v3: diameter 0.7, hole 0.3, Top Layer(Signal) to Bottom Layer(Signal), 11 vias
v4: diameter 0.6, hole 0.25, Top Layer(Signal) to Bottom Layer(Signal), 1 vias

## Nets (pads, with @x,y where several pads share a name; then routed paths per layer and width w, separated by ;. In a path a pad name is that pad's centre, name@x,y a point inside that pad or via, vN(x,y) a via of type N, cw(c..) or ccw(c..) an arc to the next point about the centre after c; other vN are vias at no path point)
+3V3: AMS1117.2 AMS1117.4 C1-M.1 C1.1 C2.1 C2_AMS.2 C3-M.1 C3.1 C4.1 C5.1 C6.1 JST.P$1 LED_Green.1 MPU.8 MPU.13 R2.2 R3.2 R4.2 STM32.1 STM32.9 STM32.24 STM32.36 STM32.48 TC2030.1 | length 125.7
  Top Layer(Signal) w0.2: C3-M.1@92.2,83.39 C3-M.1 92.2,84.06 ; 93.32,84.75 93.475,84.905 93.475,85.5 MPU.8 ; C1.1 95.5,73.466 97.05,71.916 97.05,67.75 97.25,67.55 JST.P$1 97.783,67 97.9,66.883 97.9,66.026 98.076,65.85 103.924,65.85 105.074,67 109.253,67 AMS1117.2 ; 96.248,81.248 STM32.1 97.474,81.248 97.498,81.271 97.498,81.407 97.704,81.613 97.84,81.613 97.863,81.637 STM32.48 97.863,82.75 ; MPU.13 MPU.13@96.475,86.25 ; 96.252,77.248 STM32.9 ; v3(96.334,84) 96.834,83.5 ; 96.55,85.975 96.55,86.175 MPU.13@96.475,86.25 ; v3@97.129,85.396 97.302,85.396 v3(97.397,85.3) ; 97.15,86.25 MPU.13@96.475,86.25 ; STM32.24 103.363,74.387 103.609,74.141 103.903,74.141 ; STM32.36 104.288,81.248 104.75,81.71 ; 105.5,73.5 v3(106,74) ; C5.1 C5.1@105.55,81.95 ; v3@106.95,81.95 v3(107,82) ; AMS1117.4 116.795,67.175 AMS1117.4@117.32,67.7
  Top Layer(Signal) w0.3: C3-M.1@92.09,83.39 C3-M.1 ; C3-M.1@92.2,83.39 92.2,82.2 C3.1 C2.1 ccw(c95.152,81.4) 95.152,81.248 96.248,81.248 ; 92.2,84.06 92.658,84.518 93.088,84.518 93.32,84.75 ; 94.25,67.75 JST.P$1@97.05,67.75 ; C1.1 95.548,77.248 96.252,77.248 ; 96.55,85.975 v3@97.129,85.396 ; 96.834,83.5 C6.1 97.863,83.5 97.863,82.75 ; 97.15,86.25 C1-M.1 ; R4.2 R3.2 v3(103.5,85.5) ; 103.903,74.141 103.974,74.141 104.29,73.825 104.29,73.61 C4.1 105.5,73.5 ; 104.75,81.71 104.94,81.9 C5.1 ; C5.1@105.55,81.95 v3@106.95,81.95 ; C2_AMS.2 108.61,67.24 109.013,67.24 109.253,67 ; R2.2 113.65,92.137 113.31,91.797 TC2030.1 114.159,91 v3(116,91) ; AMS1117.4@117.32,67.7 LED_Green.1
  Top Layer(Signal) w0.4: C3-M.1@92.09,83.39 89,80.3 89,73 94.25,67.75
  Bottom Layer(Signal) w0.2: v3(96.334,84) v3@96.334,84.118 ; v3@97.397,85.182 v3@97.516,85.182 ; v3(97.397,85.3) v3@97.516,85.182 ; 97.834,85.5 97.729,85.396 97.628,85.396 97.516,85.283 v3@97.516,85.182 ; 106.883,83 107,82.883
  Bottom Layer(Signal) w0.3: v3@96.334,84.118 v3@97.397,85.182 ; 97.834,85.5 v3(103.5,85.5) ; v3(106,74) 106,79 107,80 v3(107,82) 107,82.883 ; 106.883,83 106,83 v3(103.5,85.5) ; v3(116,91) 116,89 112.5,85.5 v3(103.5,85.5)
+5V: AMS1117.3 C1_AMS.2 C2_Con.1 FB1.2 | length 22.3
  Top Layer(Signal) w0.2: v3(108,65) v3@108.135,65 ; C2_Con.1 C2_Con.1@111.25,77.9 ; 111.25,72.294 111.66,71.884 111.66,71.74 C1_AMS.2 C1_AMS.2@111.95,71.55 ; v3@111.95,72.95 v3(112,73)
  Top Layer(Signal) w0.3: v3@108.135,65 108.425,64.71
  Top Layer(Signal) w0.4: 108.425,64.71 AMS1117.3 ; 111.25,72.294 C2_Con.1@111.25,77.9 ; C1_AMS.2@111.95,71.55 v3@111.95,72.95
  Bottom Layer(Signal) w0.4: v3(108,65) 107,66 107,70 110,73 v3(112,73)
Crystal_IN: C10.1 Crystal.3 R-Crystal.2 | length 5
  Top Layer(Signal) w0.2: R-Crystal.2 91.85,78.425 92.85,77.425 C10.1 92.85,73.925 Crystal.3
GND: AMS1117.1 C1-M.2 C1.2 C1_AMS.1 C1_Con.2 C2-M.2 C2.2 C2_AMS.1 C2_Con.2 C3-M.2 C3.2 C4-M.2 C4.2 C5.2 C6.2 C7.2 C8.2 C9.2 C10.2 Connector.5 Crystal.2 Crystal.4 JST.P$6 MPU.1 MPU.9 MPU.11 MPU.18 MPU.25 R1.1 R_AMS.1 R_LED_CPU.1 STM32.8 STM32.23 STM32.35 STM32.47 STM32.49 TC2030.5 | length 161.8
  Top Layer(Signal) w0.2: MPU.1 92.95,88.75 94.2,87.5 MPU.25 94,87.25 MPU.9 94,84.568 94.25,84.318 C2-M.2 C3-M.2 94,82.5 95,82.5 95.5,83 95.5,83.006 95.684,83.189 95.684,84.099 95,84.783 MPU.11 ; v2(94.8,88.05) 94.85,88.05 95.55,88.75 MPU.18 97.15,88.75 C1-M.2 ; C2.2 C3.2 91.034,80.6 90.1,79.666 90.1,76.584 90.35,76.334 C9.2 90.35,74.26 92.06,72.55 92.758,72.55 92.875,72.433 Crystal.4 92.875,71.475 93.7,70.65 95.274,70.65 95.45,70.826 95.45,72.95 94.625,73.775 Crystal.2 94.625,74.775 C10.2 93.666,75.766 93.666,76.31 95.196,77.84 95.34,77.84 C1.2 ; C4-M.2 98,88.9 C1-M.2 ; 96.25,77.798 96.3,77.748 STM32.8 99.863,77.748 v2(100.613,78.498) ; v2(98.413,80.698) 98.363,80.748 STM32.47 98.363,82.383 98.48,82.5 ; R1.1 98.45,85.575 98.75,85.875 98.875,85.875 99.05,86.05 99.05,86.099 99.298,86.347 99.298,86.817 99.417,86.936 99.417,87.247 99.417,87.583 99.26,87.74 98.16,87.74 C1-M.2 ; v2(102.813,76.298) 102.863,76.248 STM32.23 102.863,74.137 ; v2(102.813,80.698) 102.863,80.748 STM32.35 104.015,80.75 104.75,80.75 ; AMS1117.1 110.139,69.29 109.431,68.583 109.431,68.521 109.06,68.15 C2_AMS.1 106.675,68.15 105.925,67.4 103.7,67.4 103.5,67.2 JST.P$6 103.5,67.55 101.45,69.6 C7.2 101.61,73.34 101.61,73.196 101.866,72.94 103.04,72.94 C4.2 103.76,73.34 103.76,73.196 104.016,72.94 105.94,72.94 107.05,74.05 107.05,76.874 106.874,77.05 106.675,77.05 106.5,77.225 R_LED_CPU.1 106.5,78.075 107.2,78.775 108.324,78.775 109.099,78 C2_Con.2 110.35,77.074 110.645,76.779 110.645,71.955 C1_AMS.1 111.26,71.34 111.26,71.196 111.516,70.94 112.753,70.94 113.313,71.5 R_AMS.1 R_AMS.1@114.85,71.575 ; TC2030.5 110.618,90.151 110.204,89.736 105.381,89.736 105.264,89.854 105.264,92.264 107,94 C8.2 110.26,94.16 110.26,94.304 110.731,94.775 115.108,94.775 117,92.883 117,90.1 115.69,88.79 115.69,84.314 114.7,83.324 114.7,81.651 114.876,81.475 115.05,81.475 115.225,81.3 Connector.5 115.815,81.175 116.504,81.175 117.1,80.579 117.1,75.976 114.85,73.726 R_AMS.1@114.85,71.575 ; C1_Con.2 112.35,74.075 R_AMS.1@114.85,71.575
  Top Layer(Signal) w0.3: C1.2 95.61,77.89 95.974,77.89 96.066,77.798 96.25,77.798 ; 98.48,82.5 98.65,82.67 C6.2 ; 102.863,74.137 103.075,73.925 103.175,73.925 C4.2 ; 104.75,80.75 104.99,80.99 105.39,80.99 C5.2
  other v1: 93.75,62.75 110.75,63 113.75,63 118.25,63.5 107,64.25 93.75,64.5 93.75,66.25 91.75,68.5 107.865,69 94,69.5 90.25,70.25 100.75,70.5 109.25,70.75 102.5,71 104.25,71 106.25,71 89,71.25 99.75,71.75 107.5,72.25 119,72.75 90,73.25 107.75,74.25 109.25,74.5 113.5,74.75 115,74.75 96.25,75.5 94.75,76 121.25,76.5 91.75,77 121.25,79.5 113,81 91.5,81.5 121.25,81.5 89.75,82.25 108.75,82.25 113.25,83 121.25,83.25 111.25,83.5 89.75,84 101,84 106.75,84.5 117.5,85 89.75,85.5 114.5,85.5 101,86.25 89.75,86.5 106.25,87 118,87.75 89.75,88.25 106.25,88.5 118,90 104,90.75 118,92 96,92.885 108.25,93.5 115.25,93.5 93,94.5 96.25,94.5 99,94.5 117,94.5 106.25,95
  other v2: 98.413,76.298 99.513,76.298 100.613,76.298 101.713,76.298 98.413,77.398 99.513,77.398 100.613,77.398 101.713,77.398 102.813,77.398 98.413,78.498 99.513,78.498 101.713,78.498 102.813,78.498 98.413,79.598 99.513,79.598 100.613,79.598 101.713,79.598 102.813,79.598 99.513,80.698 100.613,80.698 101.713,80.698 93.7,86.95 94.8,86.95 93.7,88.05
IMU_CPOUT: C4-M.1 MPU.20 | length 1.6
  Top Layer(Signal) w0.2: MPU.20 95.025,89.5 95.025,90.925 C4-M.1
IMU_INT: MPU.12 STM32.45 | length 7.2
  Top Layer(Signal) w0.2: MPU.12 95.5,84.849 95.699,84.65 99.096,84.65 99.363,84.383 STM32.45
IMU_REGOUT: C2-M.1 MPU.10 | length 2.3
  Top Layer(Signal) w0.2: MPU.10 94.5,84.718 95.05,84.168 C2-M.1
IMU_SCL: MPU.23 R3.1 STM32.42 | length 24
  Top Layer(Signal) w0.2: MPU.23 93.5,91 94.25,91.75 97.5,91.75 98.5,90.75 v3(98.5,90) ; STM32.42 100.863,82.187 100.938,82.262 100.938,82.349 101.187,82.598 101.963,82.598 103.615,84.25 104.633,84.25 104.75,84.367 104.75,87.5 104.75,88.25 103,90 v3(101.75,90)
  Bottom Layer(Signal) w0.2: v3(98.5,90) v3(101.75,90)
IMU_SDA: MPU.24 R4.1 STM32.43 | length 20.2
  Top Layer(Signal) w0.2: MPU.24 93,91.066 94.084,92.15 98.166,92.15 100.45,89.866 100.45,87.8 R4.1 100.75,87.425 102.25,85.925 102.25,83.785 101.463,82.998 101.021,82.998 100.373,82.349 100.373,81.908 STM32.43
MCU_BOOT0: R1.2 STM32.44 | length 3.6
  Top Layer(Signal) w0.2: R1.2 99.863,85.387 STM32.44
MCU_LED_A: LED_Red.1 STM32.26 | length 2.1
  Top Layer(Signal) w0.2: STM32.26 104.023,76.238 104.711,76.238 104.95,76 LED_Red.1
MCU_LED_K: LED_Red.2 R_LED_CPU.2 | length 2.7
  Top Layer(Signal) w0.2: R_LED_CPU.2 108.1,77.7 108.1,77.4 LED_Red.2
MCU_NRST: C8.1 R2.1 STM32.7 TC2030.3 | length 35.1
  Top Layer(Signal) w0.2: v4(94.657,78.843) 94.734,78.919 95.219,78.919 95.3,79 95.5,79 96.252,78.248 STM32.7 ; v3(106,91.25) 108.294,91.25 110.74,93.696 110.74,93.84 C8.1 R2.1 112.35,90.62 112.04,90.31 TC2030.3
  Bottom Layer(Signal) w0.2: v4(94.657,78.843) 94.6,78.9 94.6,79.443 94.5,79.543 94.5,85.5 97.4,88.4 103.15,88.4 v3(106,91.25)
MCU_OS_IN: C9.1 Crystal.1 STM32.5 | length 17.5
  Top Layer(Signal) w0.2: Crystal.1 94.625,71.725 93.4,72.95 92.226,72.95 91.768,73.408 91.768,75.132 C9.1 90.99,75.91 90.99,76.26 90.5,76.75 90.5,79.5 91,80 95.75,80 96.502,79.248 STM32.5
MCU_OS_OUT: R-Crystal.1 STM32.6 | length 4.9
  Top Layer(Signal) w0.2: R-Crystal.1 93.15,78.575 94.175,79.6 95.5,79.6 96.352,78.748 STM32.6
MCU_PA4: JST.P$2 STM32.14 | length 8.9
  Top Layer(Signal) w0.2: STM32.14 98.363,74.494 97.5,73.631 97.5,68.5 97.875,68.125 97.925,68.125 98.5,67.55 JST.P$2
MCU_PA5: JST.P$3 STM32.15 | length 9.2
  Top Layer(Signal) w0.2: STM32.15 98.863,74.429 98,73.566 98,69.3 99.75,67.55 JST.P$3
MCU_PA6: JST.P$4 STM32.16 | length 9.5
  Top Layer(Signal) w0.2: STM32.16 99.363,74.363 98.5,73.5 98.5,70.05 101,67.55 JST.P$4
MCU_PA7: JST.P$5 STM32.17 | length 9.9
  Top Layer(Signal) w0.2: STM32.17 99.863,74.809 99.788,74.734 99.788,74.038 98.9,73.15 98.9,70.85 102,67.75 102.05,67.75 102.25,67.55 JST.P$5
MCU_SWCLK: STM32.37 TC2030.4 | length 13.7
  Top Layer(Signal) w0.2: STM32.37 103.363,82.613 104.1,83.35 109.35,83.35 112.04,86.04 TC2030.4
MCU_SWDIO: STM32.34 TC2030.2 | length 15.4
  Top Layer(Signal) w0.2: STM32.34 104.748,80.248
  Top Layer(Signal) w0.3: 104.748,80.248 104.75,80.25 109,80.25 113.31,84.56 TC2030.2
MCU_SWO: STM32.39 TC2030.6 | length 13.6
  Top Layer(Signal) w0.2: STM32.39 102.373,81.908 102.373,82.442 103.681,83.75 109,83.75 110.77,85.52 TC2030.6
MCU_VCAP1: C7.1 STM32.22 | length 1.6
  Top Layer(Signal) w0.2: 102.363,74.363 STM32.22
  Top Layer(Signal) w0.3: C7.1 102.25,74.25 102.363,74.363
NetLED_Green_2: LED_Green.2 R_AMS.2 | length 3.3
  Top Layer(Signal) w0.2: R_AMS.2 117.05,71.5 LED_Green.2
USB_N: Connector.2 STM32.32 | length 11.8
  Top Layer(Signal) w0.26: STM32.32 104.278,79.248 104.296,79.266 109.995,79.266 110.172,79.443 115.597,79.443 Connector.2
USB_P: Connector.3 STM32.33 | length 11.8
  Top Layer(Signal) w0.26: STM32.33 104.278,79.748 104.296,79.73 109.803,79.73 109.98,79.907 115.597,79.907 Connector.3
VBUS: C1_Con.1 Connector.1 FB1.1
pads on no net: Connector.4 Connector.6 Connector.7 Connector.8 Connector.9 Connector.10 Connector.11 JST.P$7 JST.P$8 MPU.2 MPU.3 MPU.4 MPU.5 MPU.6 MPU.7 MPU.14 MPU.15 MPU.16 MPU.17 MPU.19 MPU.21 MPU.22 STM32.2 STM32.3 STM32.4 STM32.10 STM32.11 STM32.12 STM32.13 STM32.18 STM32.19 STM32.20 STM32.21 STM32.25 STM32.27 STM32.28 STM32.29 STM32.30 STM32.31 STM32.38 STM32.40 STM32.41 STM32.46 TC2030.

## Polygon pours and split planes (outlines as drawn)
+3V3 on Top Layer(Signal) "NONET_L-01_P-001" (solid, remove dead copper, pour order 9): 108.25,67.75 114.75,67.75 116,69 117.5,69 117.75,68.75 117.75,65.5 117.25,65 111.5,65 110.25,66.25 108.75,66.25 108,67 108,67.5
+5V on Top Layer(Signal) "NONET_L-01_P-001" (solid, remove dead copper, pour order 6): 110.75,78.5 112.5,78.5 112.75,78.25 112.75,77.75 112.5,77.5 111,77.5 110.75,77.75
VBUS on Top Layer(Signal) "NONET_L-01_P-001" (solid, remove dead copper, pour order 4): 113,79 112.75,78.75 112.75,75.75 113,75.5 113.5,75.5 113.75,75.75 113.75,78.25 116.5,78.25 116.75,78.5 116.75,78.75 116.5,79
GND on L3 (GND) "NONET_L-01_P-001" (solid, remove dead copper, pour order 12): 89,92.46 cw(c91.54,92.46) 91.54,95 118.46,95 cw(c118.46,92.46) 121,92.46 121,65.54 cw(c118.46,65.54) 118.46,63 91.54,63 cw(c91.54,65.54) 89,65.54
GND on L2 (GND) "NONET_L-01_P-001" (solid, remove dead copper, pour order 11): 89,92.46 cw(c91.54,92.46) 91.54,95 118.46,95 cw(c118.46,92.46) 121,92.46 121,65.54 cw(c118.46,65.54) 118.46,63 91.54,63 cw(c91.54,65.54) 89,65.54

## Silkscreen, mask and mechanical layers (free items; w line width, h text height)
Top Overlay:
  drawing of 23 lines, arcs and shapes, not listed
  text "SMD" at 108.401,84.504 h1.2
  text "USB" at 115.901,74.004 h1.2
  text "MCU" at 97.004,72.754 h1.2
Mechanical 1:
  lines w0.254: 89.102,62.898 ccw(c89.102,62.898) 89.102,62.898 ; 89.102,62.898 ccw(c91.27,65.066) 91.27,62 118.73,62 ccw(c118.73,65.066) 120.898,62.898 121.102,63.102 ccw(c118.934,65.27) 122,65.27 122,92.73 ccw(c118.934,92.73) 121.102,94.898 120.898,95.102 ccw(c118.73,92.934) 118.73,96 91.27,96 ccw(c91.27,92.934) 89.102,95.102 88.898,94.898 ccw(c91.066,92.73) 88,92.73 88,65.27 ccw(c91.066,65.27) 88.898,63.102 89.102,62.898